# Altium PCB uMultimeter_ExpDev_Pcb.PcbDoc
Units mil, origin at the board's own origin, x right, y up, seen from the top; angles counter-clockwise.
Board outline 2500 x 1260 mil, 2 copper layers (Top Layer, Bottom Layer); 10 components, 21 nets, 232 pads, 0 vias.
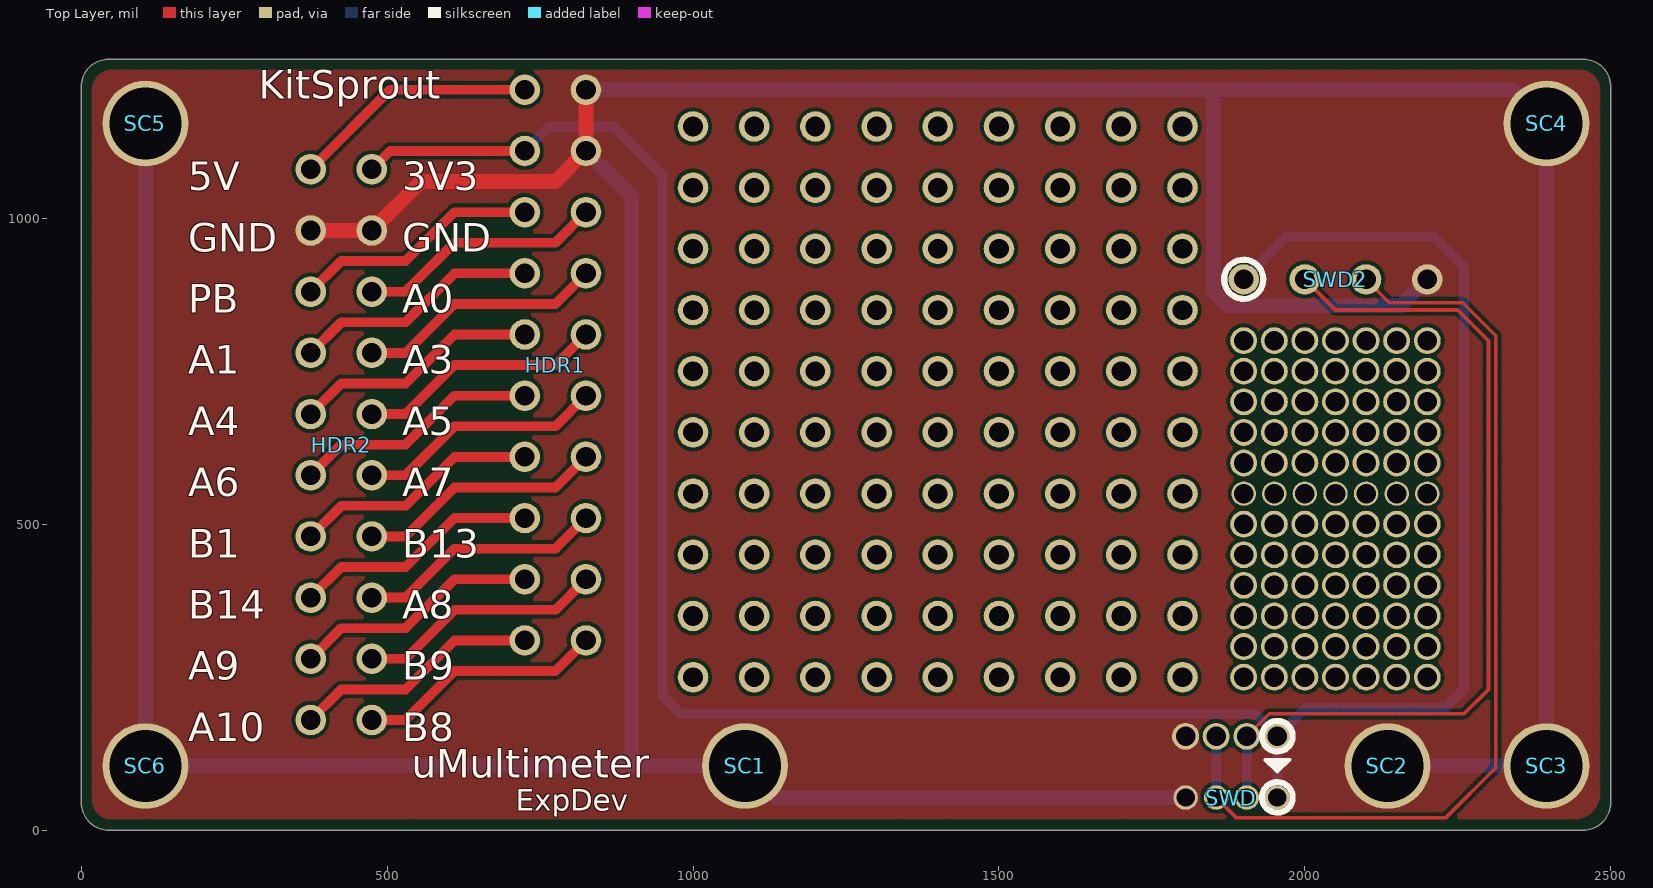
[diagram p0: Top Layer view]
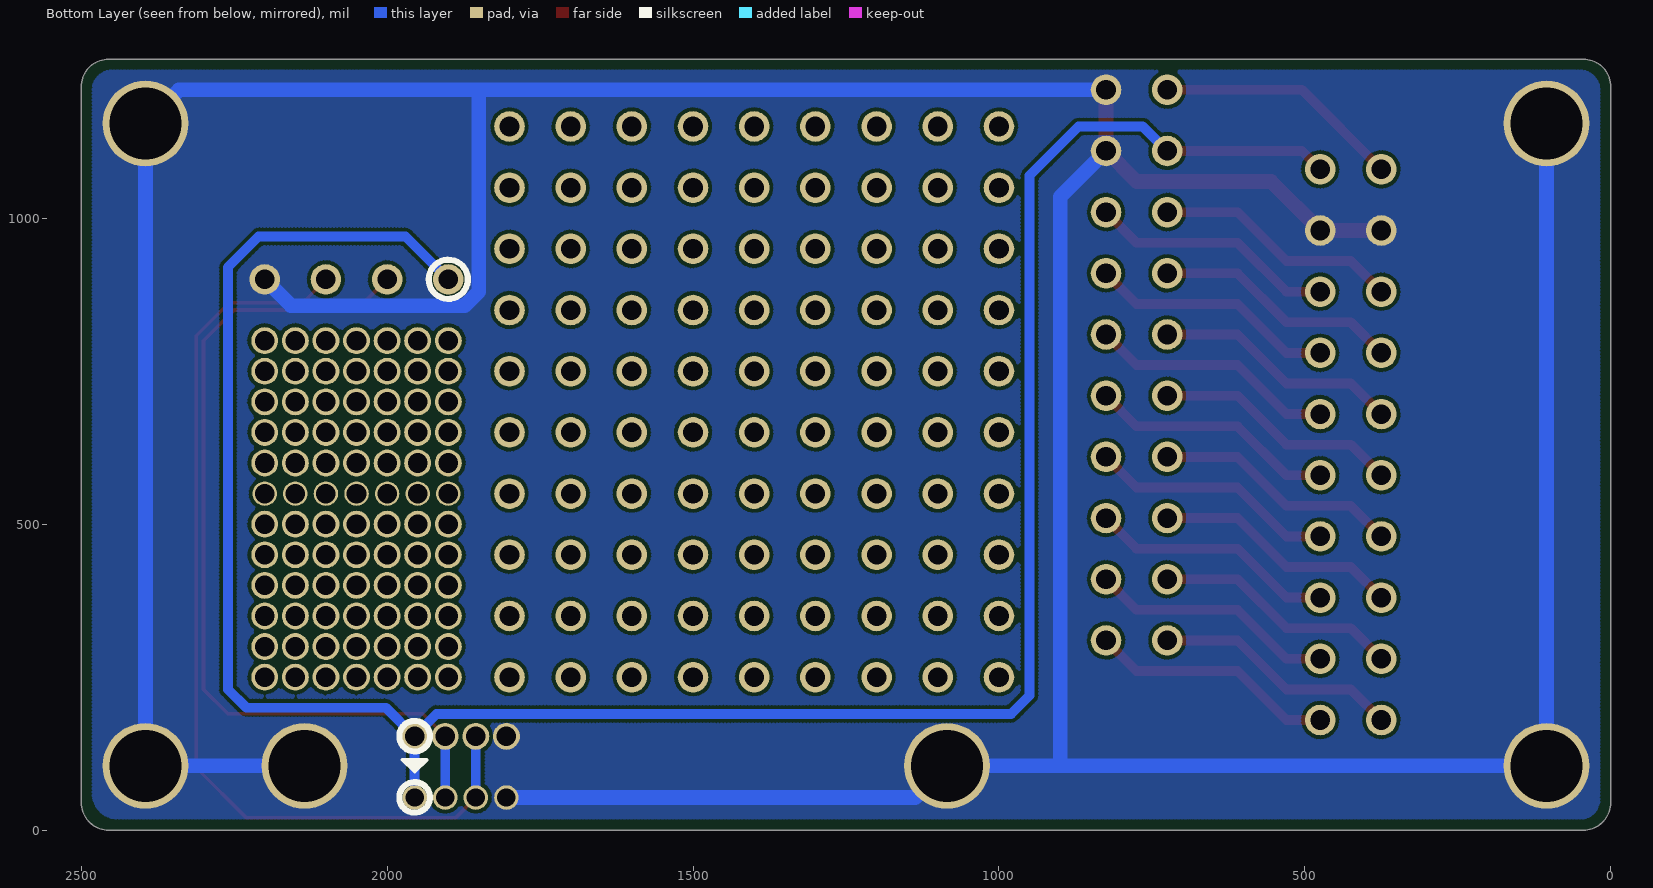
[diagram p1: Bottom Layer view, seen from below]
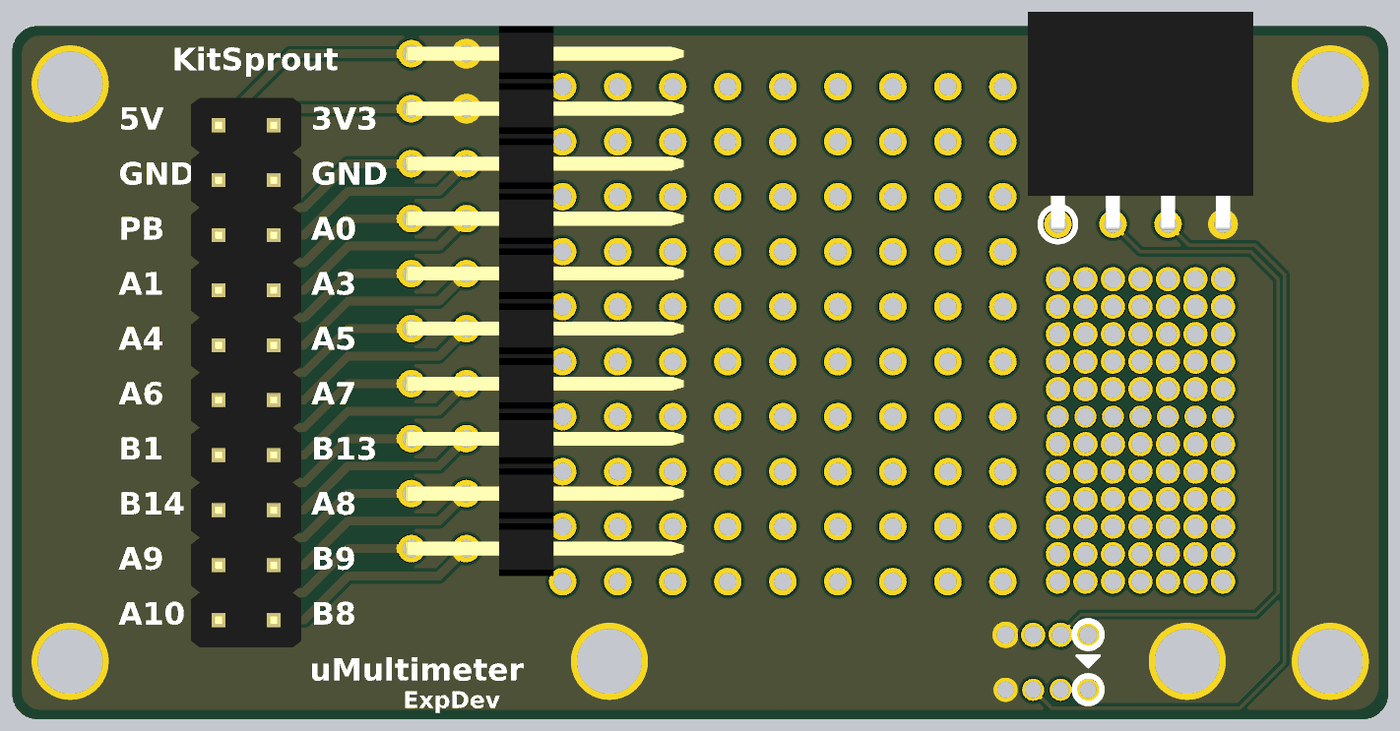
[diagram p2: 3D render of the assembled board from above, using the file's embedded part models]

## Layer stack, top to bottom
Top Solder: solder mask 0.4, Solder Resist, Dk 3.5
Top Layer: signal copper 1.4
Dielectric1: dielectric 12.6, FR-4, Dk 4.8
Bottom Layer: signal copper 1.4
Bottom Solder: solder mask 0.4, Solder Resist, Dk 3.5

## Board outline
0,45 ccw(c45,45) 45,0 2455,0 ccw(c2455,45) 2500,45 2500,1215 ccw(c2455,1215) 2455,1260 45,1260 ccw(c45,1215) 0,1215

## Design rules (kind name [scope] priority, off if disabled: settings)
Clearance ClearancePolygon [InPolygon] p1: gap=6
Clearance [All] p2: gap=6
ComponentClearance [All] p1: gap=0 collisioncheckmode=3 verticalgap=0 showdistances=FALSE
Height [All] p1: minheight=0 maxheight=5000 prefheight=500
HoleSize [All] p1: absolutevalues=TRUE maxlimit=200 minlimit=1 maxpercent=80.000 minpercent=20.000
HoleToHoleClearance [All] p1: gap=6 allowstackedmicrovias=TRUE
MinimumSolderMaskSliver [All] p1: minsoldermaskwidth=4
PlaneConnect [All] p1: planeconnectstyle=Direct reliefexpansion=20 reliefentries=4 reliefconductorwidth=20 reliefairgap=10
PolygonConnect [All] p1: connectstyle=Direct reliefconductorwidth=20 reliefentries=4 polygonreliefangle="90 Angle" airgapwidth=10
RoutingVias [All] p1: holewidth=12 width=20 viastyle="Through Hole" minholewidth=12 minwidth=20 maxholewidth=100 maxwidth=200
SilkToSilkClearance [All] p1: silktosilkclearance=0
SilkToSolderMaskClearance SilkscreenOverComponentPads [IsPad] p1: minsilkscreentomaskgap=1 clearancetoexposedcopper=TRUE
SolderMaskExpansion [All] p1: expansion=2
Width [All] p1: maxlimit=64 minlimit=6 preferedwidth=10
22 further rules are at their usual default settings.

## Components (designator, comment, footprint, x,y, rotation, side; value= is the part's Value field where it differs from the comment)
HDR1 "HDR2x10_2.54" HDR2X10_2.54_90 725,1210 r0 top locked
HDR2 "HDR2x10_2.54" HDR2X10_2.54_180 375,1080 r0 top
SC1 "M3" SCRREW_M3 1085,105 r0 top locked
SC2 "M3" SCRREW_M3 2135,105 r0 top locked
SC3 "M3" SCRREW_M3 2395,105 r0 top (schematic designator SC2)
SC4 "M3" SCRREW_M3 2395,1155 r0 top (schematic designator SC2)
SC5 "M3" SCRREW_M3 105,1155 r0 top (schematic designator SC2)
SC6 "M3" SCRREW_M3 105,105 r0 top (schematic designator SC2)
SWD "HDR1x4_1.27T" HDR1X4_1.27_180 1955,53.25 r270 top
SWD2 "HDR1x4_2.54" HDR1X4_2.54_90F 1900,900 r90 top

## Footprints (in the part's own frame and the unit in brackets; to place one, negate y for a bottom-side part, rotate by r counter-clockwise, add the part's x,y. Pads: shape width x height; smd on the part's side, far side on the other; paste and mask are expansions set on the pad)
HDR1X4_1.27_180 [mil]
  round 40 hole 30: 1(0,0) 2(0,-50) 3(0,-100) 4(0,-150)
HDR1X4_2.54_90F [mil]
  round 50 hole 32: 1(0,0) 2(0,-100) 3(0,-200) 4(0,-300)
  body extent -10,-355 386,55, height 99
HDR2X10_2.54_90 [mil]
  round 50 hole 32: 1(0,0) 2(100,0) 3(0,-100) 4(100,-100) 5(0,-200) 6(100,-200) 7(0,-300) 8(100,-300) 9(0,-400) 10(100,-400) 11(0,-500) 12(100,-500) 13(0,-600) 14(100,-600) 15(0,-700) 16(100,-700) 17(0,-800) 18(100,-800) 19(0,-900) 20(100,-900)
  body extent -12,-950 495,50, height 198
HDR2X10_2.54_180 [mil]
  round 50 hole 32: 1(0,0) 2(100,0) 3(0,-100) 4(100,-100) 5(0,-200) 6(100,-200) 7(0,-300) 8(100,-300) 9(0,-400) 10(100,-400) 11(0,-500) 12(100,-500) 13(0,-600) 14(100,-600) 15(0,-700) 16(100,-700) 17(0,-800) 18(100,-800) 19(0,-900) 20(100,-900)
  body extent -50,-950 150,50, height 335
SCRREW_M3 [mil]
  round 140 hole 118 mask+0: 0(0,0)

## Part data
HDR1 HDR2 SWD SWD2: "Header"
SC1 SC2 SC3 SC4 SC5 SC6: library part Screw_M3, "Screw"

## Free pads (board coordinates)
  round 50 hole 32: 0(1000,250) 0(1000,350) 0(1000,450) 0(1000,550) 0(1000,650) 0(1000,750) 0(1000,850) 0(1000,950) 0(1000,1050) 0(1000,1150) 0(1100,250) 0(1100,350) 0(1100,450) 0(1100,550) 0(1100,650) 0(1100,750) 0(1100,850) 0(1100,950) 0(1100,1050) 0(1100,1150) 0(1200,250) 0(1200,350) 0(1200,450) 0(1200,550) 0(1200,650) 0(1200,750) 0(1200,850) 0(1200,950) 0(1200,1050) 0(1200,1150) 0(1300,250) 0(1300,350) 0(1300,450) 0(1300,550) 0(1300,650) 0(1300,750) 0(1300,850) 0(1300,950) 0(1300,1050) 0(1300,1150) 0(1400,250) 0(1400,350) 0(1400,450) 0(1400,550) 0(1400,650) 0(1400,750) 0(1400,850) 0(1400,950) 0(1400,1050) 0(1400,1150) 0(1500,250) 0(1500,350) 0(1500,450) 0(1500,550) 0(1500,650) 0(1500,750) 0(1500,850) 0(1500,950) 0(1500,1050) 0(1500,1150) 0(1600,250) 0(1600,350) 0(1600,450) 0(1600,550) 0(1600,650) 0(1600,750) 0(1600,850) 0(1600,950) 0(1600,1050) 0(1600,1150) 0(1700,250) 0(1700,350) 0(1700,450) 0(1700,550) 0(1700,650) 0(1700,750) 0(1700,850) 0(1700,950) 0(1700,1050) 0(1700,1150) 0(1800,250) 0(1800,350) 0(1800,450) 0(1800,550) 0(1800,650) 0(1800,750) 0(1800,850) 0(1800,950) 0(1800,1050) 0(1800,1150)
  round 44 hole 32: 0(1805,153.25) 0(1855,153.25) 0(1900,250) 0(1900,300) 0(1900,350) 0(1900,400) 0(1900,450) 0(1900,500) 0(1900,600) 0(1900,650) 0(1900,700) 0(1900,750) 0(1900,800) 0(1905,153.25) 0(1950,250) 0(1950,300) 0(1950,350) 0(1950,400) 0(1950,450) 0(1950,500) 0(1950,600) 0(1950,650) 0(1950,700) 0(1950,750) 0(1950,800) 0(1955,153.25) 0(2000,250) 0(2000,300) 0(2000,350) 0(2000,400) 0(2000,450) 0(2000,500) 0(2000,600) 0(2000,650) 0(2000,700) 0(2000,750) 0(2000,800) 0(2050,250) 0(2050,300) 0(2050,350) 0(2050,400) 0(2050,450) 0(2050,500) 0(2050,600) 0(2050,650) 0(2050,700) 0(2050,750) 0(2050,800) 0(2100,250) 0(2100,300) 0(2100,350) 0(2100,400) 0(2100,450) 0(2100,500) 0(2100,600) 0(2100,650) 0(2100,700) 0(2100,750) 0(2100,800) 0(2150,250) 0(2150,300) 0(2150,350) 0(2150,400) 0(2150,450) 0(2150,500) 0(2150,600) 0(2150,650) 0(2150,700) 0(2150,750) 0(2150,800) 0(2200,250) 0(2200,300) 0(2200,350) 0(2200,400) 0(2200,450) 0(2200,500) 0(2200,600) 0(2200,650) 0(2200,700) 0(2200,750) 0(2200,800)
  round 40 hole 32: 0(1900,550) 0(1950,550) 0(2000,550) 0(2050,550) 0(2100,550) 0(2150,550) 0(2200,550)

## Nets (pads, with @x,y where several pads share a name; then routed paths per layer and width w, separated by ;. In a path a pad name is that pad's centre, name@x,y a point inside that pad or via, vN(x,y) a via of type N, cw(c..) or ccw(c..) an arc to the next point about the centre after c; other vN are vias at no path point)
3V3: HDR1.3 HDR2.2 pad.0@1955,153.25 SWD2.1 SWD.1 | length 3956.8
  Top Layer w16: HDR2.2 505,1110 HDR1.3
  Bottom Layer w16: HDR1.3 765,1150 870,1150 950,1070 950,220 980,190 1919.16,190 1955,154.16 SWD.1 ; SWD2.1 1970,970 2210,970 2260,920 2260,230 2230,200 2001.75,200 pad.0@1955,153.25
5V: HDR1.1 HDR2.1 | length 403.8
  Top Layer w16: HDR2.1 505,1210 HDR1.1
A0: HDR1.6 HDR2.6 | length 403.8
  Top Layer w16: HDR2.6 530,880 610,960 775,960 HDR1.6
A1: HDR1.7 HDR2.7 | length 403.8
  Top Layer w16: HDR2.7 425,830 530,830 610,910 HDR1.7
A3: HDR1.8 HDR2.8 | length 403.8
  Top Layer w16: HDR2.8 530,780 610,860 775,860 HDR1.8
A4: HDR1.9 HDR2.9 | length 403.8
  Top Layer w16: HDR2.9 425,730 530,730 610,810 HDR1.9
A5: HDR1.10 HDR2.10 | length 403.8
  Top Layer w16: HDR2.10 530,680 610,760 775,760 HDR1.10
A6: HDR1.11 HDR2.11 | length 403.8
  Top Layer w16: HDR2.11 425,630 530,630 610,710 HDR1.11
A7: HDR1.12 HDR2.12 | length 403.8
  Top Layer w16: HDR2.12 530,580 610,660 775,660 HDR1.12
A8: HDR1.16 HDR2.16 | length 403.8
  Top Layer w16: HDR2.16 530,380 610,460 775,460 HDR1.16
A9: HDR1.17 HDR2.17 | length 403.8
  Top Layer w16: HDR2.17 425,330 530,330 610,410 HDR1.17
A10: HDR1.19 HDR2.19 | length 403.8
  Top Layer w16: HDR2.19 425,230 530,230 610,310 HDR1.19
B1: HDR1.13 HDR2.13 | length 403.8
  Top Layer w16: HDR2.13 425,530 530,530 610,610 HDR1.13
B8: HDR1.20 HDR2.20 | length 403.8
  Top Layer w16: HDR2.20 530,180 610,260 775,260 HDR1.20
B9: HDR1.18 HDR2.18 | length 403.8
  Top Layer w16: HDR2.18 530,280 610,360 775,360 HDR1.18
B13: HDR1.14 HDR2.14 | length 403.8
  Top Layer w16: HDR2.14 530,480 610,560 775,560 HDR1.14
B14: HDR1.15 HDR2.15 | length 403.8
  Top Layer w16: HDR2.15 425,430 530,430 610,510 HDR1.15
GND: HDR1.2 HDR1.4 HDR2.3 HDR2.4 pad.0@1805,153.25 SC1.0 SC2.0 SC3.0 SC4.0 SC5.0 SC6.0 SWD2.4 SWD.4 | length 8206.5
  Top Layer w24: HDR2.3 HDR2.4 555,1060 775,1060 HDR1.4 HDR1.2
  Bottom Layer w24: SC5.0 SC6.0 SC1.0 ; HDR1.4 900,1035 900,105 SC1.0 ; HDR1.2 2340,1210 SC4.0 SC3.0 SC2.0 ; SWD.4 1136.75,53.25 SC1.0 ; 1850,1210 1850,880 1873,857 2157,857 SWD2.4
PROBE: HDR1.5 HDR2.5 | length 403.8
  Top Layer w16: HDR2.5 425,930 530,930 610,1010 HDR1.5
SWC: pad.0@1855,153.25 SWD2.3 SWD.3 | length 1560.8
  Top Layer w6: SWD.3 1888.25,20 2230,20 2312,102 2312,808 2258,862 2138,862 SWD2.3
  Bottom Layer w16: SWD.3 pad.0@1855,153.25
SWD: pad.0@1905,153.25 SWD2.2 SWD.2 | length 1438.2
  Top Layer w6: pad.0@1905,153.25 1941.75,190 2260,190 2300,230 2300,800 2250,850 2050,850 SWD2.2
  Bottom Layer w16: SWD.2 pad.0@1905,153.25

## Polygon pours and split planes (outlines as drawn)
GND on Top Layer "Top Layer-No Net" (hatched 45Degree grid 4 track 6, remove dead copper, pour order 14): 100,1240 50,1240 ccw(c50,1210) 20,1210 20,50 ccw(c50,50) 50,20 2440,20 ccw(c2440,60) 2480,60 2480,1210 ccw(c2450,1210) 2450,1240
GND on Bottom Layer "Top Layer-No Net" (hatched 45Degree grid 4 track 6, remove dead copper, pour order 16): 100,1240 50,1240 ccw(c50,1210) 20,1210 20,50 ccw(c50,50) 50,20 2440,20 ccw(c2440,60) 2480,60 2480,1210 ccw(c2450,1210) 2450,1240

## Silkscreen, mask and mechanical layers (free items; w line width, h text height)
Top Overlay:
  circle w10: c1955,153.49 r25.01
  circle w10: c1900,900.25 r32
  circle w10: c1955,53.49 r25.01
  region: 1935,115.25 1975,115.25 1955,95.25
  lines w6: 1935,115.25 1975,115.25 1955,95.25 1935,115.25
  text "KitSprout" at 290,1180 h80
  text "5V" at 175,1030 h80
  text "3V3" at 525,1030 h80
  text "GND" at 175,930 h80
  text "GND" at 525,930 h80
  text "PB" at 175,830 h80
  text "A0" at 525,830 h80
  text "A1" at 175,730 h80
  text "A3" at 525,730 h80
  text "A4" at 175,630 h80
  text "A5" at 525,630 h80
  text "A6" at 175,530 h80
  text "A7" at 525,530 h80
  text "B1" at 175,430 h80
  text "B13" at 525,430 h80
  text "B14" at 175,330 h80
  text "A8" at 525,330 h80
  text "A9" at 175,230 h80
  text "B9" at 525,230 h80
  text "A10" at 175,130 h80
  text "B8" at 525,130 h80
  text "uMultimeter" at 540,70 h80
  text "ExpDev" at 710,20 h60
Bottom Overlay:
  circle w10: c1955,153.49 r25.01
  circle w10: c1900,900.25 r32
  circle w10: c1955,53.49 r25.01
  region: 1935,115.25 1975,115.25 1955,95.25
  lines w6: 1935,115.25 1955,95.25 1975,115.25 1935,115.25
Mechanical 1:
  the board outline again, w2